# Altium PCB PDP-11-CPU.PcbDoc
Units mil, origin at the board's own origin, x right, y up, seen from the top; angles counter-clockwise.
Board outline 15690 x 11625 mil, 4 copper layers (Component, 5v, GND, Signal), stack 23.712 mil thick; 27 components, 155 nets, 408 pads, 0 vias.
Unrouted connection lines stored in the file: 216.
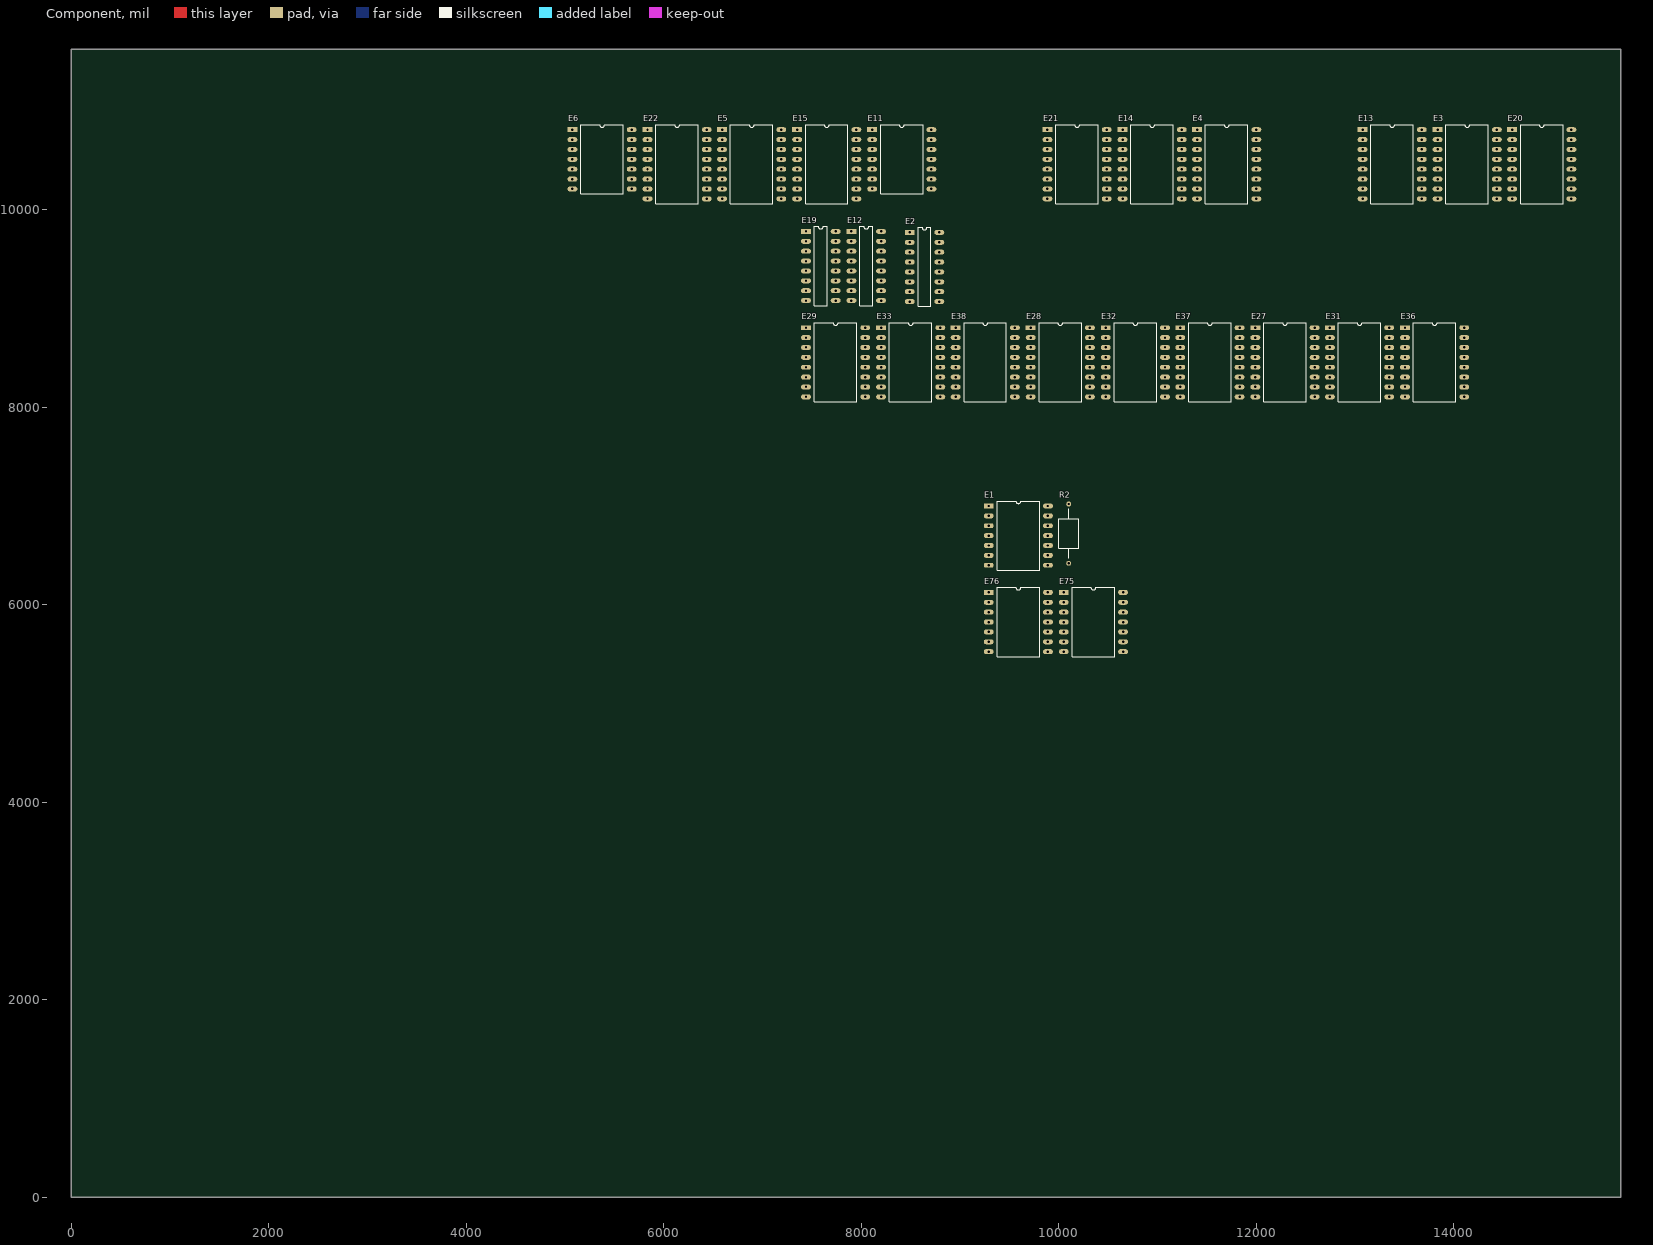
[diagram p0: Component view]
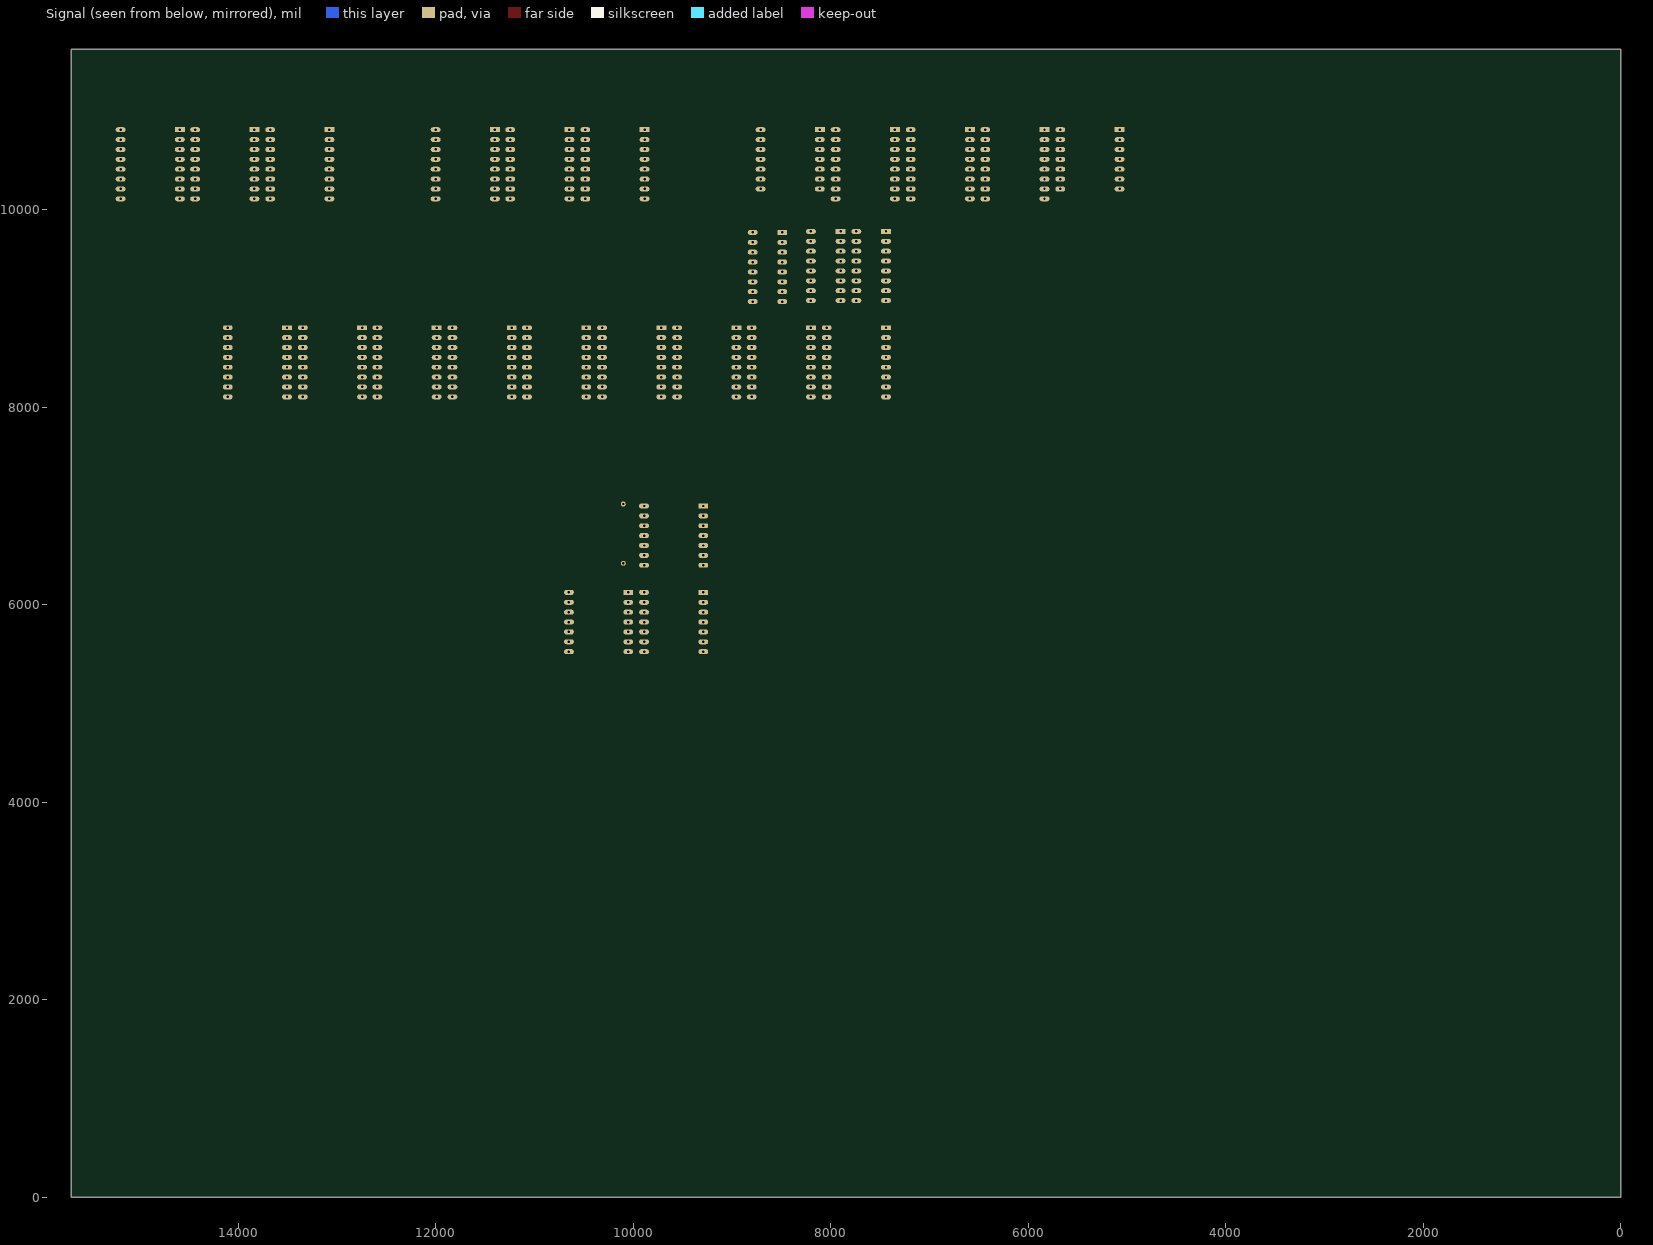
[diagram p1: Signal view, seen from below]
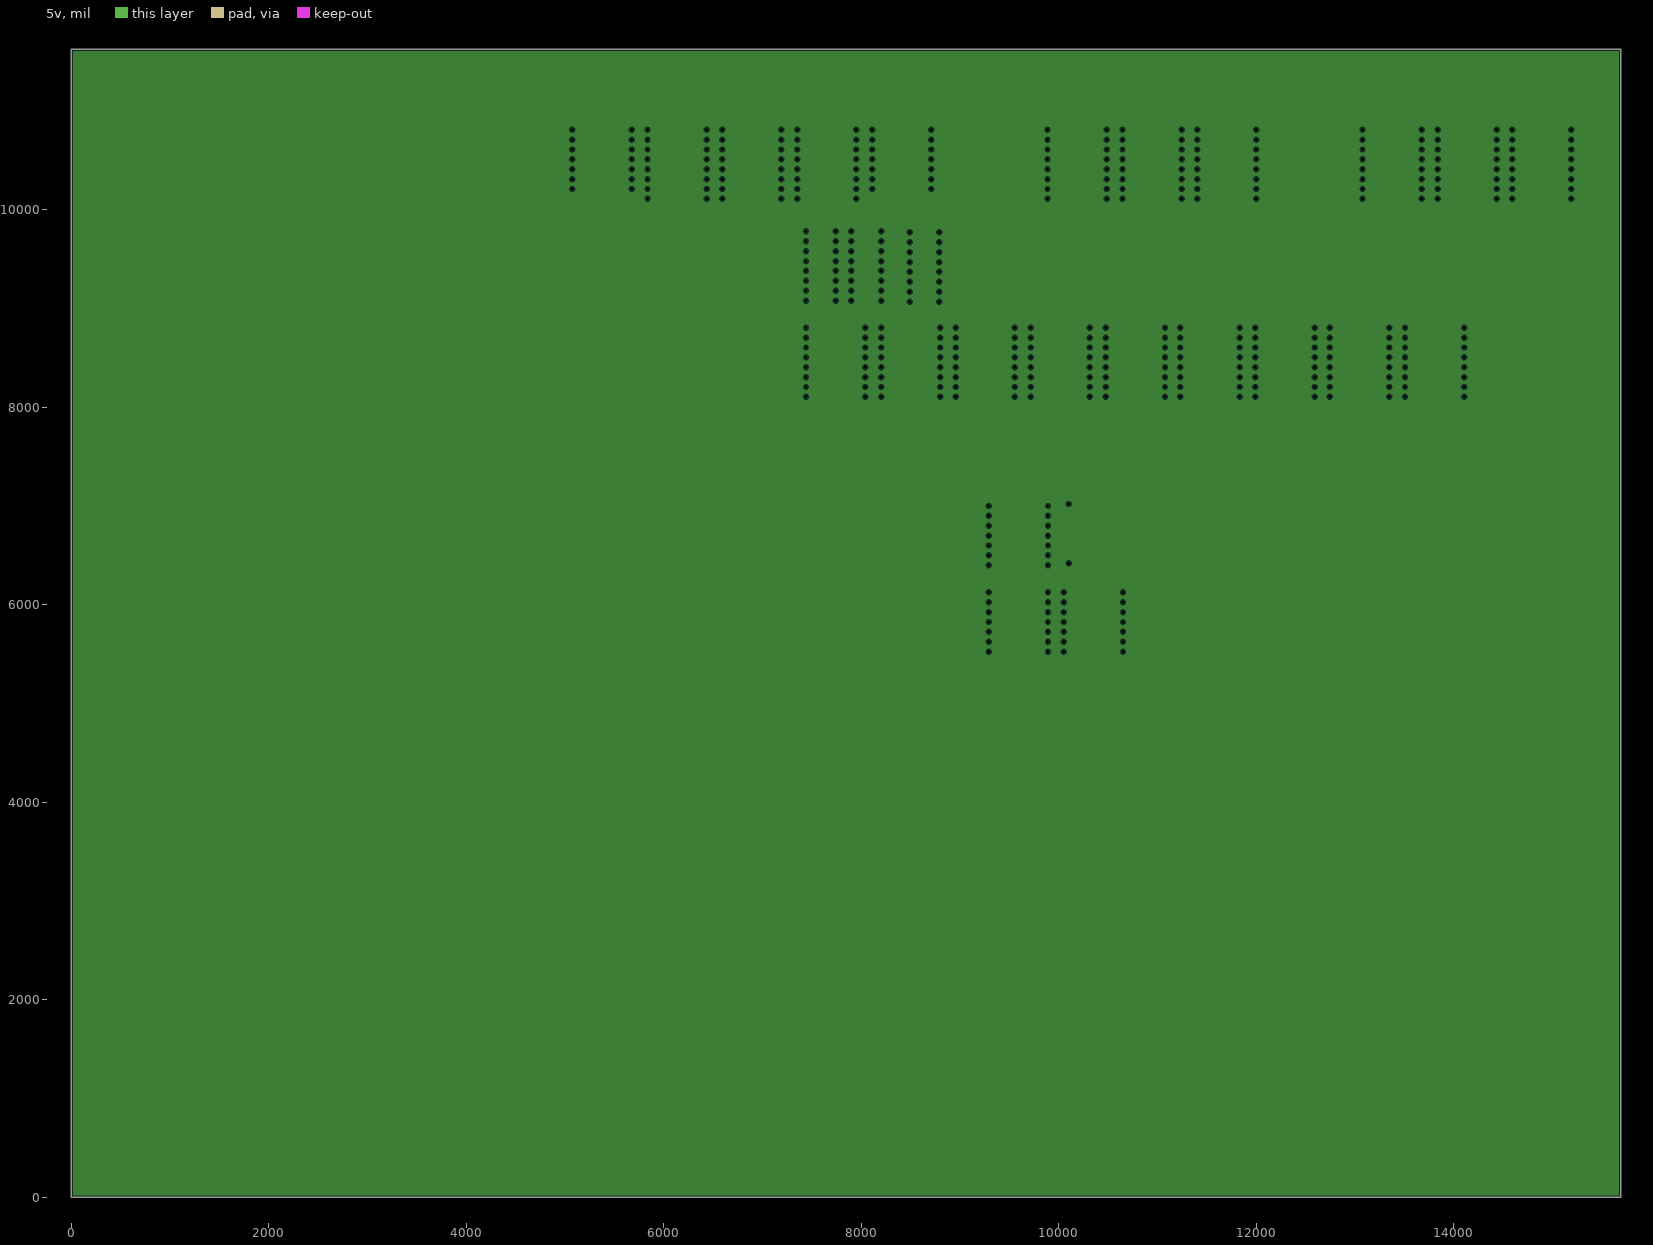
[diagram p2: 5v, clearances drawn from the general rule]
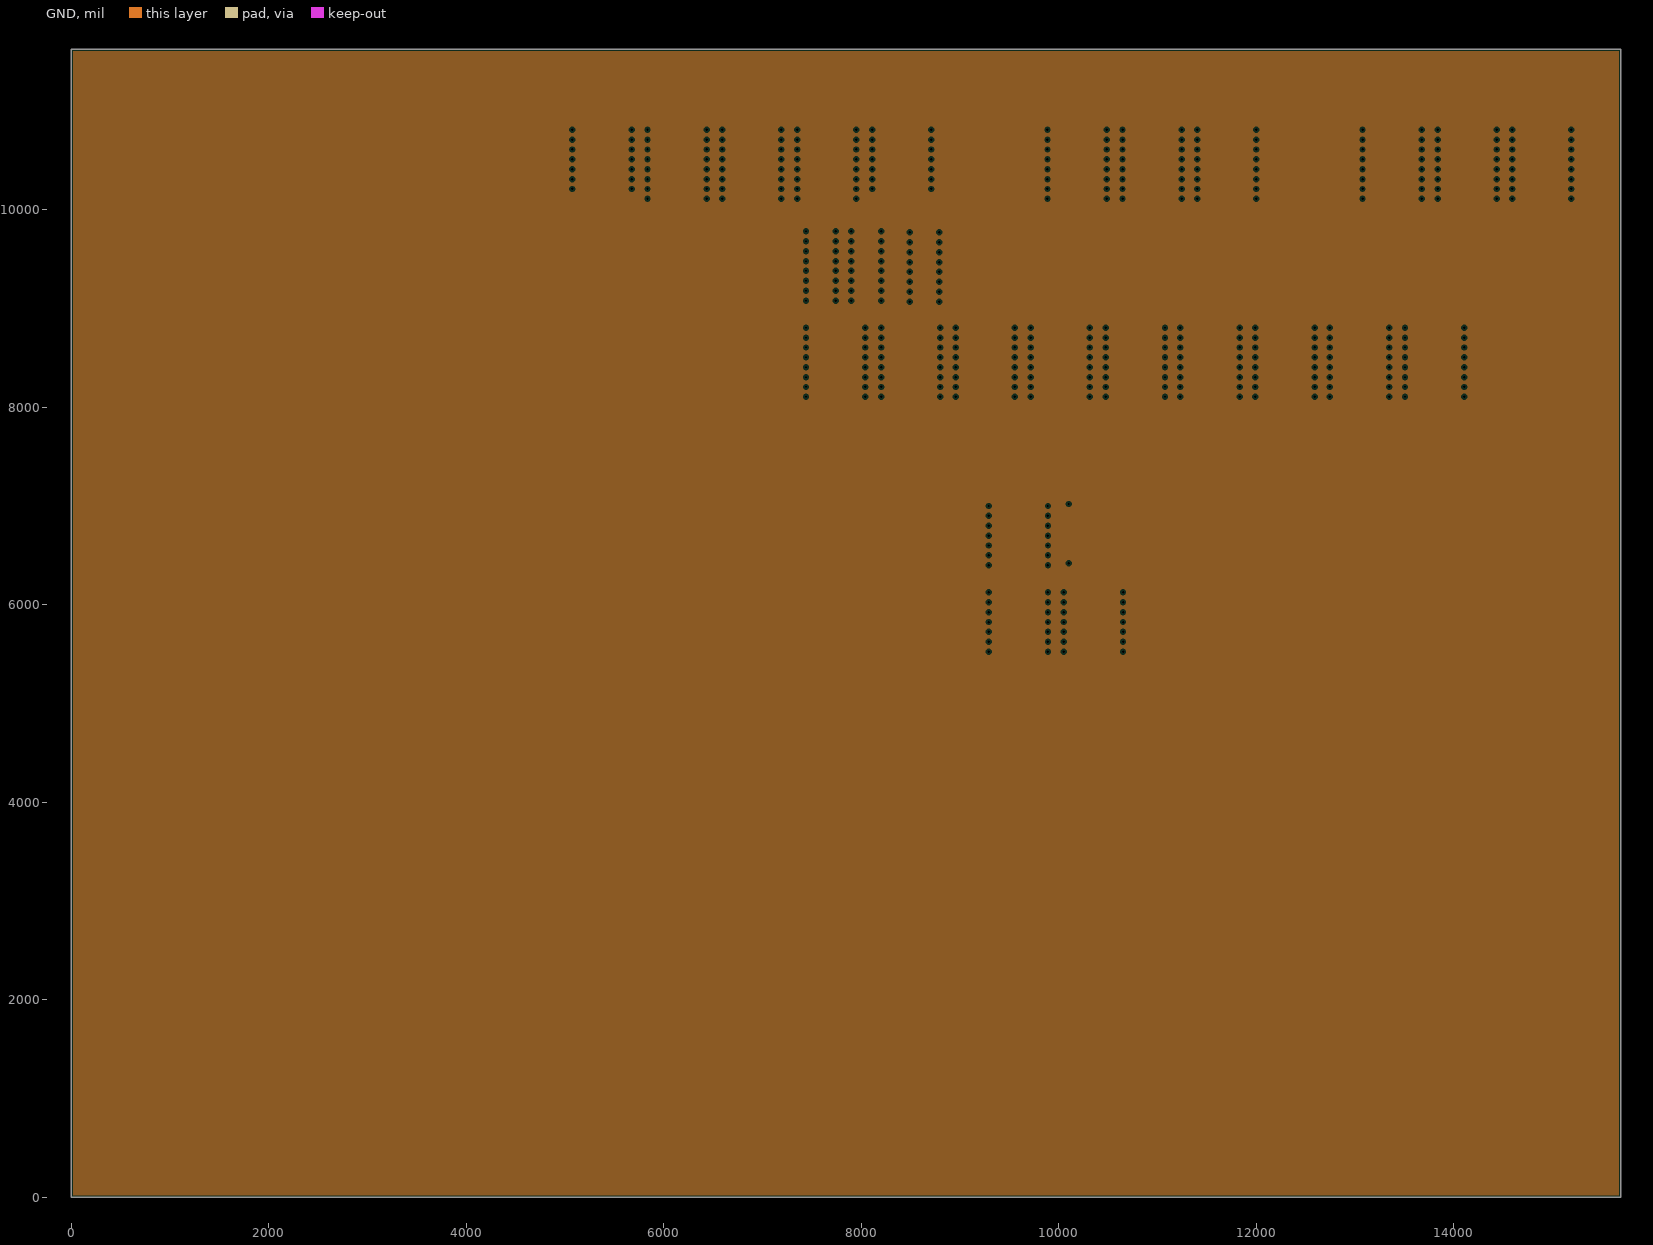
[diagram p3: GND, clearances drawn from the general rule]

## Layer stack, top to bottom
Top Solder: solder mask 0.4, Solder Resist, Dk 3.5
Component: signal copper 1.378
Dielectric 4: prepreg 2.8, PP-006, Dk 4.1
5v: plane copper 1.378
Dielectric 1: dielectric 12.6, FR-4, Dk 4.8
GND: plane copper 1.378
Dielectric 5: prepreg 2.8, PP-006, Dk 4.1
Signal: signal copper 1.378
Bottom Solder: solder mask 0.4, Solder Resist, Dk 3.5

## Board outline
0,0 15690,0 15690,11625 0,11625

## Design rules (kind name [scope] priority, off if disabled: settings)
Clearance [All] p1: gap=10 ignorepadtopadclearanceinfootprint=FALSE
PlaneClearance [All] p1: clearance=20
PlaneConnect [All] p1: planeconnectstyle=Relief reliefexpansion=20 reliefentries=4 reliefconductorwidth=10 reliefairgap=10
PolygonConnect [All] p1: connectstyle=Relief reliefconductorwidth=10 reliefentries=4 polygonreliefangle="90 Angle" airgapwidth=10
RoutingVias [All] p1: holewidth=28 width=50 viastyle="Through Hole" minholewidth=28 minwidth=50 maxholewidth=28 maxwidth=50
SolderMaskExpansion [All] p1: expansion=4 istentingtop=FALSE
SupplyNets "Schematic Supply Nets_1" [InNet('+5')] p1: voltage=0.000
SupplyNets "Schematic Supply Nets" [InNet('GND')] p2: voltage=0.000
Width [All] p1: maxlimit=10 minlimit=10 preferedwidth=10
28 further rules are at their usual default settings.

## Classes and differential pairs
component class "BA-BUS ADDR": E27 E28 E29 E31 E32 E33 E36 E37 E38 E75 E76
component class "BUS REG, BA MUX": E1 E2 E3 E4 E5 E6 E11 E12 E13 E14 E15 E19 E20 E21 E22 R2

## Components (designator, comment, footprint, x,y, rotation, side; value= is the part's Value field where it differs from the comment)
E1 "74S64" DIP14 9290,7000 r0 top
E2 "74S174" DIP16-300 8490,9770 r0 top
E3 "74S153" DIP16 13835,10810 r0 top
E4 "74S153" DIP16 11400,10810 r0 top
E5 "74S153" DIP16 6590,10810 r0 top
E6 "74S04" DIP14 5075,10810 r0 top
E11 "74S04" DIP14 8110,10810 r0 top
E12 "74S174" DIP16-300 7900,9780 r0 top
E13 "74S153" DIP16 13075,10810 r0 top
E14 "74S153" DIP16 10645,10810 r0 top
E15 "74S153" DIP16 7350,10810 r0 top
E19 "74S174" DIP16-300 7440,9780 r0 top
E20 "74S153" DIP16 14590,10810 r0 top
E21 "74S153" DIP16 9885,10810 r0 top
E22 "74S153" DIP16 5835,10810 r0 top
E27 "74S153" DIP16 11990,8805 r0 top
E28 "74S153" DIP16 9715,8805 r0 top
E29 "74S153" DIP16 7440,8805 r0 top
E31 "74S153" DIP16 12745,8805 r0 top
E32 "74S153" DIP16 10475,8805 r0 top
E33 "74S153" DIP16 8200,8805 r0 top
E36 "74S153" DIP16 13505,8805 r0 top
E37 "74S153" DIP16 11230,8805 r0 top
E38 "74S153" DIP16 8955,8805 r0 top
E75 "74S11N" DIP14 10050,6125 r0 top
E76 "74S04" DIP14 9290,6125 r0 top
R2 "150" "Axial 0.6" 10100,6420 r90 top

## Footprints (in the part's own frame and the unit in brackets; to place one, negate y for a bottom-side part, rotate by r counter-clockwise, add the part's x,y. Pads: shape width x height; smd on the part's side, far side on the other; paste and mask are expansions set on the pad)
"Axial 0.6" [mil]
  round 50 hole 25: 1(0,0) 2(600,0)
  silkscreen extent 50,-100 550,100
DIP14 [mil]
  rect 100x50 hole 25: 1(0,0)
  oval 100x50 hole 25: 2(0,-100) 3(0,-200) 4(0,-300) 5(0,-400) 6(0,-500) 7(0,-600) 8(600,-600) 9(600,-500) 10(600,-400) 11(600,-300) 12(600,-200) 13(600,-100) 14(600,0)
  silkscreen extent 85,-650 515,50
DIP16 [mil]
  rect 100x50 hole 25: 1(0,0)
  oval 100x50 hole 25: 2(0,-100) 3(0,-200) 4(0,-300) 5(0,-400) 6(0,-500) 7(0,-600) 8(0,-700) 9(600,-700) 10(600,-600) 11(600,-500) 12(600,-400) 13(600,-300) 14(600,-200) 15(600,-100) 16(600,0)
  silkscreen extent 85,-750 515,50
DIP16-300 [mil]
  rect 100x50 hole 25: 1(0,0)
  oval 100x50 hole 25: 2(0,-100) 3(0,-200) 4(0,-300) 5(0,-400) 6(0,-500) 7(0,-600) 8(0,-700) 9(300,-700) 10(300,-600) 11(300,-500) 12(300,-400) 13(300,-300) 14(300,-200) 15(300,-100) 16(300,0)
  silkscreen extent 85,-750 215,50

## Part data
E2 E12 E19: Supplier Part Number 1=SN74S174N, Supplier 1="Rochester Electronics"
E3 E4 E5 E13 E14 E15 E20 E21 E22 E27 E28 E29 E31 E32 E33 E36 E37 E38: Supplier Part Number 1=DM74S153N, Supplier 1="Rochester Electronics"
E6 E11 E76: Supplier Part Number 1=595-SN74S04N, Supplier 1=Mouser
E75: Supplier Part Number 1=SN74S11N, Supplier 1="Rochester Electronics"
R2: library part Resistor, Supplier Part Number 1=2019-CF1/4C561J-ND, Supplier 1=Digikey, Supplier 2=Digikey, Supplier Part Number 2=273-OK1515E-R52CT-ND

## Nets (pads, with @x,y where several pads share a name; then routed paths per layer and width w, separated by ;. In a path a pad name is that pad's centre, name@x,y a point inside that pad or via, vN(x,y) a via of type N, cw(c..) or ccw(c..) an arc to the next point about the centre after c; other vN are vias at no path point)
+5: E1.14 E2.16 E3.16 E4.16 E5.16 E6.14 E12.16 E13.16 E14.16 E15.16 E19.16 E20.16 E21.16 E22.16 E27.16 E28.16 E29.16 E31.16 E32.16 E33.16 E36.16 E37.16 E38.16 E76.14
AB1: E1.1 R2.1
AC1: E1.2 E1.3
AD1: E11.9
AD2: E1.4 E1.5 E1.6
AL1: E2.4
AL2: E2.6
AR1: E13.11 E14.3 E14.11 E14.13 E15.10 E15.11
AR2: E15.6
BA1: E5.10
BB1: E5.6 E12.14
BC1: E12.13
BD1: E12.11
BD2: E12.6
BE1: E12.4
BE2: E12.3
BF1: E19.13
BF2: E11.13
BJ1: E19.4
BJ2: E19.3 E19.11
BK2: E20.11 E21.11 E22.11
BL2: E21.13 E22.13
BM1: E21.3 E22.3
BM2: E13.5 E14.4 E14.5 E15.4 E15.5
BS2: E3.11 E4.11 E5.11
BT2: E3.5 E3.10 E4.5 E4.10 E5.5 E12.2
BU1: E4.13 E5.13
BU2: E4.3 E5.3
CB2: E29.10
CD1: E27.11 E28.11 E29.11
CD2: E27.5 E28.5 E29.5
CE1: E28.13 E29.13
CE2: E28.3 E29.3
CF1: E27.9
CF2: E31.5 E31.11 E32.5 E32.11 E33.5 E33.11
CJ1: E32.13 E33.13
CJ2: E32.3 E33.3
CK1: E28.9
CK2: E29.9
CL1: E29.7
CM2: E37.13
CP1: E31.9 E33.9
CP2: E33.7
CR1: E2.5 E20.6 E21.6
CR2: E2.7 E20.10 E21.10 E22.10
CS1: E38.9
CS2: E38.7
DB1: E29.6
EL1: E38.10
EP2: E75.13
FA1: E38.6
GND: E1.7 E2.8 E3.1 E3.3 E3.8 E3.13 E3.15 E4.8 E5.1 E5.8 E5.15 E6.7 E11.7 E12.8 E13.1 E13.8 E13.15 E14.8 E14.15 E15.1 E15.8 E15.15 E19.8 E20.1 E20.4 E20.8 E20.15 E21.1 E21.8 E21.15 E22.1 E22.8 E22.15 E27.1 E27.3 E27.8 E27.13 E27.15 E28.1 E28.8 E28.15 E29.1 E29.8 E29.15 E31.1 E31.8 E31.15 E32.1 E32.8 E32.15 E33.1 E33.8 E33.15 E36.1 E36.8 E36.15 E37.1 E37.8 E37.15 E38.1 E38.8 E38.15 E76.7 E76.13 R2.2
NetE1_9: E1.9 E1.10 E11.8 E19.14
NetE2_1: E2.1 E12.1 E19.1
NetE2_9: E2.9 E12.9 E19.9
NetE2_10: E2.10 E13.6 E14.6
NetE2_11: E2.11
NetE2_12: E2.12
NetE2_13: E2.13
NetE2_14: E2.14
NetE2_15: E2.15 E3.6 E4.6
NetE3_2: E3.2 E6.10 E13.2 E20.2
NetE3_4: E3.4
NetE3_7: E3.7
NetE3_9: E3.9
NetE3_12: E3.12
NetE3_14: E3.14 E6.8 E13.14 E20.14 E27.14
NetE4_1: E4.1 E4.15 E14.1
NetE4_2: E4.2 E14.2 E21.2 E28.2 E32.2 E37.2
NetE4_4: E4.4 E5.4
NetE4_7: E4.7
NetE4_9: E4.9
NetE4_12: E4.12 E5.12
NetE4_14: E4.14 E6.4 E14.14 E21.14 E28.14 E32.14 E37.14
NetE5_2: E5.2 E15.2 E22.2
NetE5_7: E5.7
NetE5_9: E5.9
NetE5_14: E5.14 E6.12 E15.14 E22.14 E29.14 E33.14 E38.14
NetE6_1: E6.1
NetE6_2: E6.2
NetE6_3: E6.3
NetE6_5: E6.5
NetE6_6: E6.6
NetE6_13: E6.13
NetE11_12: E11.12
NetE12_5: E12.5 E27.6 E28.6
NetE12_7: E12.7 E27.10 E28.10
NetE12_10: E12.10 E31.6 E32.6
NetE12_12: E12.12 E31.10 E32.10
NetE12_15: E12.15 E36.6 E37.6
NetE13_3: E13.3
NetE13_4: E13.4
NetE13_7: E13.7
NetE13_9: E13.9
NetE13_10: E13.10 E14.10 E15.3
NetE13_12: E13.12
NetE13_13: E13.13
NetE14_7: E14.7
NetE14_9: E14.9
NetE14_12: E14.12 E15.12
NetE15_7: E15.7
NetE15_9: E15.9
NetE19_2: E19.2 E36.10 E37.10
NetE19_5: E19.5
NetE19_7: E19.7
NetE19_10: E19.10
NetE19_12: E19.12
NetE20_3: E20.3
NetE20_5: E20.5 E21.5 E22.5
NetE20_7: E20.7
NetE20_9: E20.9
NetE20_12: E20.12
NetE20_13: E20.13
NetE21_4: E21.4
NetE21_7: E21.7
NetE21_9: E21.9
NetE21_12: E21.12 E22.12
NetE22_4: E22.4
NetE22_6: E22.6
NetE22_7: E22.7
NetE22_9: E22.9
NetE27_2: E27.2
NetE27_4: E27.4
NetE27_7: E27.7
NetE27_12: E27.12
NetE28_4: E28.4 E29.4
NetE28_7: E28.7
NetE28_12: E28.12 E29.12
NetE29_2: E29.2 E33.2 E38.2
NetE31_2: E31.2 E36.2
NetE31_3: E31.3 E31.13 E36.3 E36.13
NetE31_4: E31.4 E36.12 E75.12
NetE31_7: E31.7
NetE31_12: E31.12 E36.4 E75.1
NetE31_14: E31.14 E36.14
NetE32_4: E32.4 E33.4
NetE32_7: E32.7
NetE32_9: E32.9
NetE32_12: E32.12 E33.12
NetE33_6: E33.6
NetE33_10: E33.10
NetE36_5: E36.5 E37.5 E38.5
NetE36_7: E36.7
NetE36_9: E36.9
NetE36_11: E36.11 E37.11 E38.11
NetE37_3: E37.3 E38.3
NetE37_4: E37.4 E38.4
NetE37_7: E37.7
NetE37_9: E37.9
NetE37_12: E37.12 E38.12
NetE75_2: E75.2 E76.12
NetLabel59: E19.15
NetLabel60: E19.6
RS1: E6.9
RS2: E6.11
pads on no net: E1.8 E1.11 E1.12 E1.13 E2.2 E2.3 E11.1 E11.2 E11.3 E11.4 E11.5 E11.6 E11.10 E11.11 E11.14 E15.13 E38.13 E75.3 E75.4 E75.5 E75.6 E75.7 E75.8 E75.9 E75.10 E75.11 E75.14 E76.1 E76.2 E76.3 E76.4 E76.5 E76.6 E76.8 E76.9 E76.10 E76.11

## Polygon pours and split planes (outlines as drawn)
no net on 5v (split plane): 15669.9,20.1 20.1,20.1 20.1,11604.9 15669.9,11604.9
no net on GND (split plane): 15669.9,20.1 20.1,20.1 20.1,11604.9 15669.9,11604.9